# EAGLE board interruptor (EAGLE 9.7.0)

Size 84.84 x 57.11 mm. Coordinates in mm from the lower left corner, seen from the top.
Outline: 0,0 84.84,0 84.84,57.11 0,57.11 0,0
Copper layers (1*16): Top 0.035mm / dielectric 1.5mm / Bottom 0.035mm
Design rules "default": minimum track width 6mil, minimum drill 0.35mm, track to track 6mil, track to pad 6mil, pad to pad 6mil, via to via 6mil, smd to smd 6mil, copper to edge 40mil, drill to drill 6mil, minimum pad ring 10mil, minimum via ring 8mil, stop-mask expansion 4mil, vias tented up to drill 0mil, thermal gap 10mil

## Footprints (pad centres in the part's own frame; a part is rotated, then mirrored left to right if it is on the bottom)
BATTERY-GENERIC = drill 1.118 pad 3.15 octagon: + 2.54,0; - -2.54,0
LEDRD254W60D565H860B = drill 0.981 pad 1.581: 1 -1.27,0; 2 1.27,0
LEDRD254W60D565H860B_G = drill 0.981 pad 1.581: 1 -1.27,0; 2 1.27,0
RESAD1016W63L850D250B = drill 0.83 pad 1.43: 1 -5.08,0; 2 5.08,0
SWITCH-SPDT-PTH-8.5X3.7MM = drill 1.016 pad 1.88: 1 -2.54,0; 2 0,0; 3 2.54,0
78B04ST = drill 0.8: 1 -3.81,-3.81; 2 -1.27,-3.81; 3 1.27,-3.81; 4 3.81,-3.81; 5 3.81,3.81; 6 1.27,3.81; 7 -1.27,3.81; 8 -3.81,3.81

## Placement (x,y rotation side)
BAT1  3V  [BATTERY-GENERIC]  8.26,9.9 0 top
BAT2  3V  [BATTERY-GENERIC]  74.66,8.26 0 top
D1  RED  [LEDRD254W60D565H860B]  8.39,48.92 180 top
D2  GREEN  [LEDRD254W60D565H860B_G]  26.18,49.2 180 top
D3  RED  [LEDRD254W60D565H860B]  78.12,47.65 180 top
D4  RED  [LEDRD254W60D565H860B]  70.48,47.73 180 top
R1  100  [RESAD1016W63L850D250B]  9.53,14.98 90 top
R2  100  [RESAD1016W63L850D250B]  75.93,13.34 90 top
S1  TOGGLE  [SWITCH-SPDT-PTH-8.5X3.7MM]  12.25,31.14 270 top
SW1  SPST-478B04ST  [78B04ST]  75.57,37.14 0 top

## Library data of the parts
BAT1 BAT2 R1 R2 S1 SW1 = Tinkercad
D1 D3 D4 = Tinkercad; CATEGORY: Opto-Electronic; SUB-CATEGORY: LED; VALUE: LED_RED
D2 = Tinkercad; CATEGORY: Opto-Electronic; SUB-CATEGORY: LED; VALUE: LED_GREEN

## Nets
BAT1+: BAT1.+ R1.1
BAT1-: BAT1.- D1.2 D2.2
BAT2+: BAT2.+ R2.1
BAT2-: BAT2.- D3.2 D4.2
S1_O: D1.1 S1.1
S1_P: R1.2 S1.2
S1_S: D2.1 S1.3
SW1_4: R2.2 SW1.1 SW1.4
SW1_5: D3.1 SW1.5
SW1_8: D4.1 SW1.8

## Tracks (layer width: path | path; a pad name or v marks a point on that pad's centre or on a via)
BAT1+  (1 unrouted)
BAT1-  (2 unrouted)
BAT2+  (1 unrouted)
BAT2-  (2 unrouted)
S1_O  (1 unrouted)
S1_P  (1 unrouted)
S1_S  (1 unrouted)
SW1_4  (2 unrouted)
SW1_5  (1 unrouted)
SW1_8  (1 unrouted)